# Altium PCB Mounting_PCB_B.PcbDoc
Units mm, origin at the board's own origin, x right, y up, seen from the top; angles counter-clockwise.
Board outline 41.5 x 73 mm, 2 copper layers (Top Layer, Bottom Layer), stack 0.325 mm thick; 24 components, 38 nets, 162 pads, 1 vias.
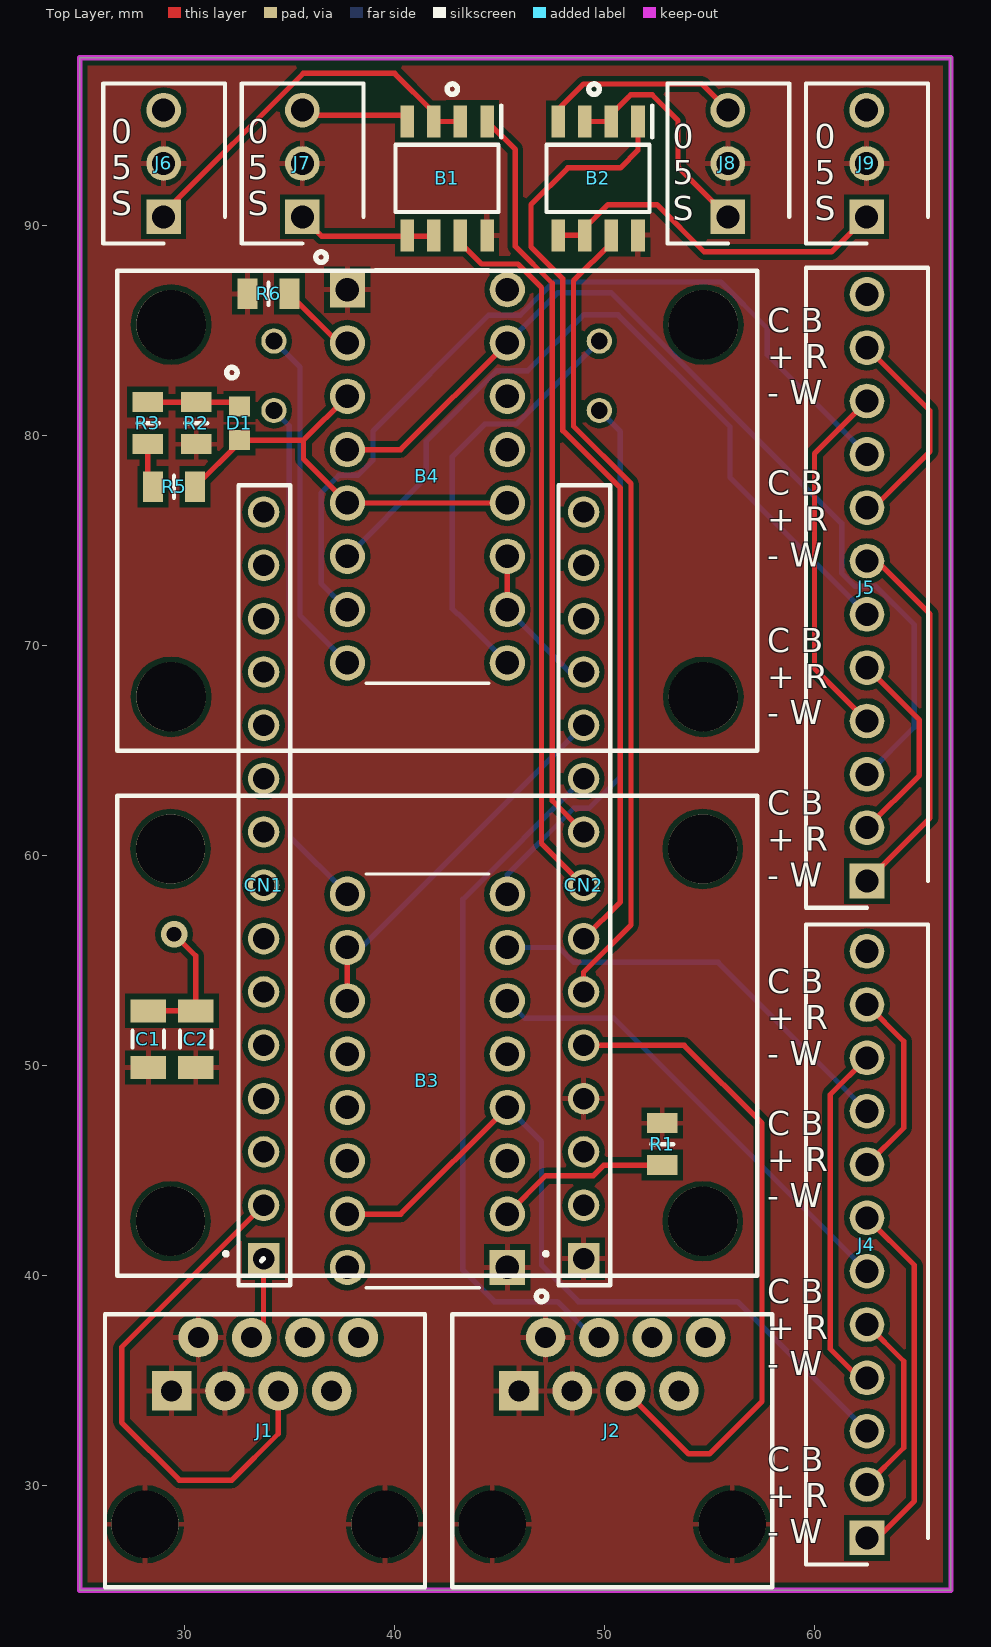
[diagram p0: Top Layer view]
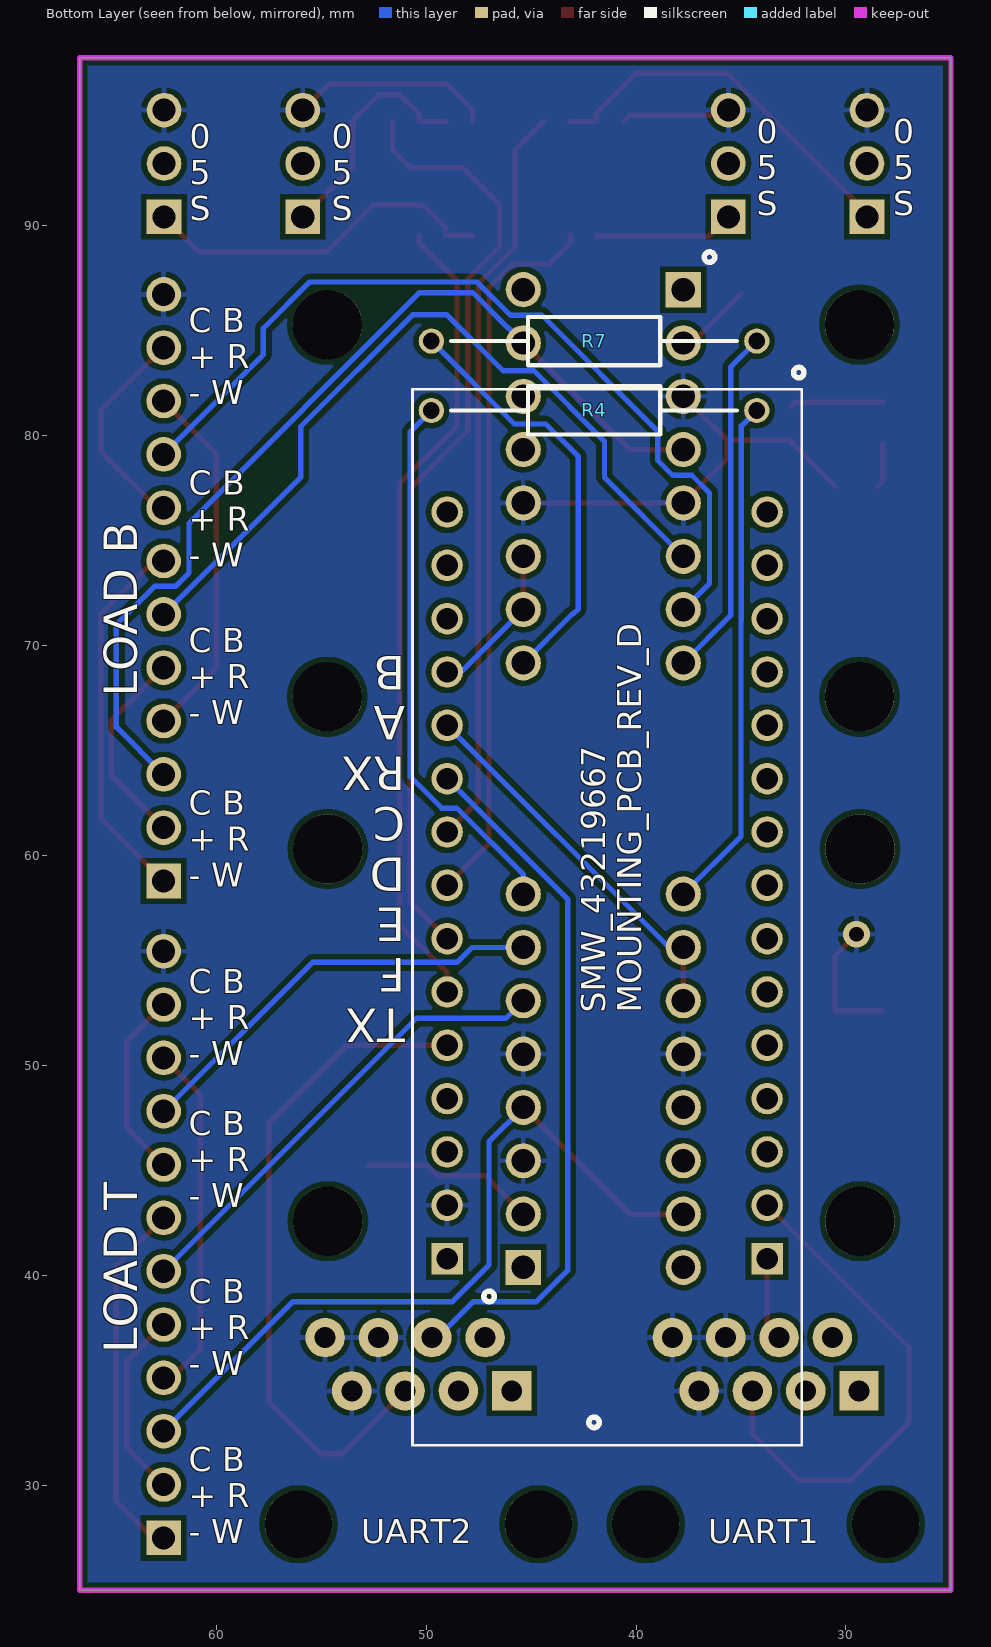
[diagram p1: Bottom Layer view, seen from below]

## Layer stack, top to bottom
Top Solder: solder mask 0.0102, Solder Resist, Dk 3.5
Top Layer: signal copper 0.0356
Dielectric 1: core 0.254, FR-4, Dk 4.2
Bottom Layer: signal copper 0.0356
Solder Side: solder mask 0.0102, Solder Resist, Dk 3.5

## Board outline
25,25 25,98 66.5,98 66.5,25

## Design rules (kind name [scope] priority, off if disabled: settings)
Clearance [All] p1: gap=0.254
PolygonConnect [All] p1: connectstyle=Relief reliefconductorwidth=0.254 reliefentries=4 polygonreliefangle="90 Angle" airgapwidth=0.254
RoomDefinition Mounting_PCB_B [InComponentClass('Mounting_PCB_B')] p1: confinementstyle=ConfineIn formatcopy=TRUE lockcomponents=FALSE outline 25,17 66.5,17 66.5,98 25,98
RoutingVias [All] p1: holewidth=0.711 width=1.27 viastyle="Through Hole" minholewidth=0.711 minwidth=1.27 maxholewidth=0.711 maxwidth=1.27
SolderMaskExpansion [All] p1: expansion=0.102
Width [All] p1: maxlimit=0.254 minlimit=0.254 preferedwidth=0.254
30 further rules are at their usual default settings.

## Components (designator, comment, footprint, x,y, rotation, side; value= is the part's Value field where it differs from the comment)
B1 "LM358AD" SOIC127P600X175-8N 42.5,92.25 r270 top
B2 "LM358AD" SOIC127P600X175-8N 49.692,92.25 r270 top
B3 "INA125PA" DIP254P762X508-16 37.75,58.16 r180 top
B4 "INA125PA" DIP254P762X508-16 45.37,69.17 r0 top
C1 "Cap 1206" C1206 28.272,51.249 r270 top
C2 "Cap 1206" C1206 30.527,51.249 r270 top
CN1 "Header 15X1_male" HDR_1x15_2R54_V_F 33.76,40.8 r90 top
CN2 "Header 15X1_male" HDR_1x15_2R54_V_F 49,40.8 r90 top
D1 "LED1" L0603 32.609,80.582 r270 top
J1 "RJ45-8" RJ45-8 33.825,28.15 r0 top
J2 "RJ45-8" RJ45-8 50.365,28.15 r0 top
J4 "22-27-2121" HDRV12W64P0X254_1X12_3048X580X1170P 62.5,27.5 r270 top
J5 "22-27-2121" HDRV12W64P0X254_1X12_3048X580X1170P 62.5,58.784 r270 top
J6 "22-27-2031" SHDR3W64P0X254_1X3_762X580X1170P 29,90.42 r90 top
J7 "22-27-2031" SHDR3W64P0X254_1X3_762X580X1170P 35.604,90.42 r90 top
J8 "22-27-2031" SHDR3W64P0X254_1X3_762X580X1170P 55.876,90.42 r90 top
J9 "22-27-2031" SHDR3W64P0X254_1X3_762X580X1170P 62.48,90.42 r90 top
R1 "CRCW080510K0FKEA" RESC2012X50N 52.75,46.25 r270 top
R2 "CRCW080510K0FKEA" RESC2012X50N 30.554,80.591 r90 top
R3 "CRCW080510K0FKEA" RESC2012X50N 28.25,80.591 r90 top
R4 "7077666" RESAD1550W58L630D230 49.75,81.196 r180 bottom
R5 "CRCW080510K0FKEA" RESC2012X50N 29.5,77.561 r180 top
R6 "CRCW080510K0FKEA" RESC2012X50N 34,86.75 r0 top
R7 "7077666" RESAD1550W58L630D230 34.25,84.5 r0 bottom

## Footprints (in the part's own frame and the unit in brackets; to place one, negate y for a bottom-side part, rotate by r counter-clockwise, add the part's x,y. Pads: shape width x height; smd on the part's side, far side on the other; paste and mask are expansions set on the pad)
C1206 [mm] "Chip Capacitor, Body 3.2x1.6mm, IPC High Density"
  rect 1.1x1.7 smd: 1(-1.35,0) 2(1.35,0)
  silkscreen extent -0.4,-0.75 0.4,0.75, body extent -1.7,-0.9 1.7,0.9, height 1.3
DIP254P762X508-16 [mil]
  rect 66x66 / inner round 66 / far side rect 66x66 hole 44: 1(-300,700)
  round 66 hole 44: 2(-300,600) 3(-300,500) 4(-300,400) 5(-300,300) 6(-300,200) 7(-300,100) 8(-300,0) 9(0,0) 10(0,100) 11(0,200) 12(0,300) 13(0,400) 14(0,500) 15(0,600) 16(0,700)
  silkscreen extent -265,-38 -35,738
HDR_1x15_2R54_V_F [mm] "Male Header, Pitch 2.54mm, 15x1 Position, Mated Height 6mm, Tail Length 3mm"
  rect 1.5x1.5 hole 1.02: 1(0,0)
  round 1.5 hole 1.02: 2(2.54,0) 3(5.08,0) 4(7.62,0) 5(10.16,0) 6(12.7,0) 7(15.24,0) 8(17.78,0) 9(20.32,0) 10(22.86,0) 11(25.4,0) 12(27.94,0) 13(30.48,0) 14(33.02,0) 15(35.56,0)
  silkscreen extent -1.27,-1.27 36.83,1.85, body extent -1.27,-1.27 36.83,1.27, height 12.7
HDRV12W64P0X254_1X12_3048X580X1170P [mm]
  rect 1.65x1.65 / inner round 1.65 / far side rect 1.65x1.65 hole 1.1: 1(0,0)
  round 1.65 hole 1.1: 2(-2.54,0) 3(-5.08,0) 4(-7.62,0) 5(-10.16,0) 6(-12.7,0) 7(-15.24,0) 8(-17.78,0) 9(-20.32,0) 10(-22.86,0) 11(-25.4,0) 12(-27.94,0)
  silkscreen extent -29.21,-2.9 1.27,2.9
L0603 [mm]
  rect 0.95x1 smd: 1(-0.8,0) 2(0.8,0)
RESAD1550W58L630D230 [mm]
  round 1.2 hole 0.8: 1(0,0) 2(15.5,0)
  silkscreen extent 0.95,-1.15 14.55,1.15
RESC2012X50N [mm]
  rect 0.95x1.45 smd: 1(-1,0) 2(1,0)
  silkscreen extent 0,-0.53 0,0.53
RJ45-8 [mil]
  round 125.98 hole 125.98: 1(-225,0) 1(225,0)
  rect 74x74 hole 39.37: 1(-175,250)
  round 74 hole 39.37: 2(-125,350) 3(-75,250) 4(-25,350) 5(25,250) 6(75,350) 7(125,250) 8(175,350)
  silkscreen extent -300,-118 300,394
SHDR3W64P0X254_1X3_762X580X1170P [mm]
  rect 1.65x1.65 / inner round 1.65 / far side rect 1.65x1.65 hole 1.1: 1(0,0)
  round 1.65 hole 1.1: 2(2.54,0) 3(5.08,0)
  silkscreen extent -1.27,-2.92 6.35,2.88
SOIC127P600X175-8N [mm]
  rect 1.525x0.65 smd: 1(-2.712,1.905) 2(-2.712,0.635) 3(-2.712,-0.635) 4(-2.712,-1.905) 5(2.712,-1.905) 6(2.712,-0.635) 7(2.712,0.635) 8(2.712,1.905)
  silkscreen extent -3.47,-2.45 1.6,2.58

## Part data
B1 B2: "LM358AD, Dual Operational Amplifier 1.1MHz 5 to 28V, 8-Pin SO"
B3 B4: "Instrumentation Amplifier with Precision Voltage Reference"
C1 C2: library part "Cap Semi", "Capacitor (Semiconductor SIM Model)"
CN1 CN2: library part "Header 15X1_Female_1", "Header, 10-Pin, Single row,female"
D1: "Typical RED GaAs LED"
J4 J5: "12way straightPCB header w/friction lock Molex KK Series, Series Number 6410, 2.54mm Pitch 12 Way 1 Row Straight PCB Header, Solder Termination, 4A"
J6 J7 J8 J9: "3way straight PCB header w/friction lock Molex KK Series, Series Number 6410, 2.54mm Pitch 3 Way 1 Row Straight PCB Header, Solder Termination, 4A"
R1 R2 R3 R5 R6: "CRCW0805 Resistor T/R 0.125W,1%,10K Vishay CRCW Series Thick Film Surface Mount Resistor 0805 Case 10k 1% 0.125W 100ppm/C"
R4 R7: "RS Pro RS Series Axial Carbon Resistor 1k 5% 0.25W -500  +350ppm/C"

## Free pads (board coordinates)
  round 3.302 hole 3.302: 2(29.33,42.581) 2(29.33,60.31) 2(29.355,67.555) 2(29.355,85.285) 2(54.679,42.581) 2(54.679,60.31) 2(54.705,67.555) 2(54.705,85.285)

## Via types
v1: diameter 1.27, hole 0.711, Top Layer to Bottom Layer, 1 vias

## Nets (pads, with @x,y where several pads share a name; then routed paths per layer and width w, separated by ;. In a path a pad name is that pad's centre, name@x,y a point inside that pad or via, vN(x,y) a via of type N, cw(c..) or ccw(c..) an arc to the next point about the centre after c; other vN are vias at no path point)
+5V: B1.8 B2.8 B3.1 B4.1 C1.2 C2.2 CN2.1 CN2.4 J1.1 J1.2 J1.3 J2.1 J2.2 J2.3 J6.2 J7.2 J8.2 J9.2 R1.1 R2.1 R6.1
A+_B: B4.6 J5.6 | length 37.8
  Bottom Layer w0.254: B4.6 41.5,78 41.5,79.724 44.865,83.089 46.339,83.089 49,85.75 50.647,85.75 55.975,80.422 55.975,78.009 J5.6
A+_T: B3.6 J4.6 | length 22.5
  Bottom Layer w0.254: B3.6 46.2,52.25 50.45,52.25 J4.6
A-_B: B4.7 J5.9 | length 41.2
  Bottom Layer w0.254: B4.7 36.5,72.96 36.5,77.264 37.347,78.111 38.255,78.111 38.969,78.825 38.969,80.219 44.481,85.731 45.981,85.731 47.567,87.317 55.546,87.317 57.75,85.113 57.75,83.854 J5.9
A-_T: B3.7 J4.9 | length 20.4
  Bottom Layer w0.254: B3.7 47.821,55.62 48.532,54.909 55.411,54.909 J4.9
ADC_A: B3.10 B3.11 CN2.11 | length 18.2
  Top Layer w0.254: B3.11 B3.10
  Bottom Layer w0.254: B3.10 38.42,55.62 CN2.11
ADC_B: B4.10 B4.11 CN2.12 | length 7.4
  Top Layer w0.254: B4.10 B4.11
  Bottom Layer w0.254: B4.10 48.34,68.74 CN2.12
ADC_C: B1.1 CN2.9 | length 35.7
  Top Layer w0.254: B1.1 45.75,93.617 45.75,89.013 47.508,87.255 47.508,62.612 CN2.9
ADC_D: B1.7 CN2.8 | length 34.4
  Top Layer w0.254: B1.7 43.135,89.182 44.147,88.169 45.875,88.169 47,87.044 47,60.58 CN2.8
ADC_E: B2.1 CN2.7 | length 45
  Top Layer w0.254: CN2.7 50.75,57.79 50.75,77.5 48.016,80.234 48.016,87.465 46.5,88.981 46.5,91 48.25,92.75 50.75,92.75 51.597,93.597 B2.1
ADC_F: B2.7 CN2.6 | length 38.9
  Top Layer w0.254: CN2.6 49,54.441 51.258,56.699 51.258,77.71 48.524,80.444 48.524,87.379 50.327,89.182 B2.7
E+_B: B4.4 B4.15 J5.3 | length 46.1
  Top Layer w0.254: B4.4 40.29,79.33 B4.15
  Bottom Layer w0.254: B4.15 46.081,85.121 46.09,85.121 47.777,86.809 50.307,86.809 61.294,75.822 61.294,73.456 61.932,72.818 62.932,72.818 64.75,71 64.75,66.114 J5.3
E+_T: B3.4 B3.15 J4.3 | length 36.7
  Top Layer w0.254: B3.15 40.29,42.92 B3.4
  Bottom Layer w0.254: B3.4 47,46.37 47,40.5 48.75,38.75 56.33,38.75 J4.3
GND: B1.4 B2.4 B3.3 B3.5 B3.12 B4.3 B4.5 B4.12 C1.1 C2.1 CN2.2 D1.2 J1.6 J1.7 J1.8 J2.6 J2.7 J2.8 J4.12 J5.12 J6.3 J7.3 J8.3 J9.3 R5.1 | length 41.8
  Top Layer w0.254: C1.1 C2.1 30.527,55.223 v1(29.5,56.25) ; R5.1 32.609,79.67 D1.2 35.662,79.782 ; J7.3 35.854,95.25 40.307,95.25 B1.4 ; B4.3 35.662,79.782 ; B4.12 B4.5 35.662,78.878 35.662,79.782 ; B2.4 47.787,95.529 49,96.742 54.634,96.742 J8.3
IN_C: B1.2 B1.3 J6.1 | length 18.3
  Top Layer w0.254: J6.1 29,90.601 35.649,97.25 40,97.25 41.865,95.385 B1.3 B1.2
IN_D: B1.5 B1.6 J7.1 | length 6.7
  Top Layer w0.254: J7.1 36.524,89.5 41.827,89.5 B1.6
IN_E: B2.2 B2.3 J8.1 | length 11.3
  Top Layer w0.254: B2.3 B2.2 50.327,95.318 51.114,96.106 51.122,96.106 51.25,96.234 52.266,96.234 53.5,95 53.5,92.796 J8.1
IN_F: B2.5 B2.6 J9.1 | length 17.5
  Top Layer w0.254: B2.5 B2.6 49.057,89.894 50.162,91 52.5,91 54.75,88.75 60.81,88.75 J9.1 J9.1@62.48,90.77
N1_B: J5.1 J5.7 | length 18
  Top Layer w0.254: J5.1 65.5,61.784 65.5,71.5 62.976,74.024 J5.7
N1_T: J4.1 J4.7 | length 17.4
  Top Layer w0.254: J4.1 63,27.5 64.758,29.258 64.758,40.482 J4.7
N2_B: J5.4 J5.10 | length 17.3
  Top Layer w0.254: J5.4 60,68.904 60,79.144 J5.10
N2_T: J4.4 J4.10 | length 16.9
  Top Layer w0.254: J4.4 62.13,35.12 60.75,36.5 60.75,48.61 J4.10
N3_B: J5.2 J5.5 | length 9.7
  Top Layer w0.254: J5.2 64.992,63.816 64.992,66.452 J5.5
N3_T: J4.2 J4.5 | length 9.1
  Top Layer w0.254: J4.2 64.25,31.79 64.25,35.91 J4.5
N4_B: J5.8 J5.11 | length 10.3
  Top Layer w0.254: J5.8 62.814,76.564 65.5,79.25 65.5,81.184 J5.11
N4_T: J4.8 J4.11 | length 9.1
  Top Layer w0.254: J4.8 64.25,47.03 64.25,51.15 J4.11
NetB3_2: B3.2 R1.2 | length 8.3
  Top Layer w0.254: B3.2 47.199,44.749 49.468,44.749 49.969,45.25 R1.2
NetB3_8: B3.8 R4.1 | length 26.1
  Bottom Layer w0.254: B3.8 45.37,59.089 48.532,62.251 49.25,62.251 50.75,63.751 50.75,80.196 R4.1
NetB3_9: B3.9 R4.2 | length 24.5
  Bottom Layer w0.254: R4.2 34.984,80.462 34.984,71.218 35,71.202 35,60.91 B3.9
NetB4_2: B4.2 R6.2 | length 3.7
  Top Layer w0.254: R6.2 37.34,84.41 B4.2
NetB4_8: B4.8 R7.1 | length 16.8
  Bottom Layer w0.254: R7.1 35.492,83.258 35.492,71.428 B4.8
NetB4_9: B4.9 R7.2 | length 20.2
  Bottom Layer w0.254: B4.9 43.04,71.5 43,71.5 42.75,71.75 42.75,79 44.299,80.549 45.799,80.549 R7.2
NetD1_1: D1.1 R2.2 R3.2 | length 4.4
  Top Layer w0.254: R3.2 R2.2 32.4,81.591 D1.1
NetR3_1: R3.1 R5.2 | length 2.1
  Top Layer w0.254: R3.1 28.25,77.812 R5.2
UART1_RX: CN1.2 J1.5 | length 24.7
  Top Layer w0.254: CN1.2 27,36.58 27,33 29.75,30.25 32.25,30.25 34.46,32.46 J1.5
UART1_TX: CN1.1 J1.4 | length 4
  Top Layer w0.254: J1.4 33.76,37.61 CN1.1
UART2_RX: CN2.10 J2.4 | length 33.6
  Bottom Layer w0.254: CN2.10 43.25,57.91 43.25,40.25 44.75,38.75 47.75,38.75 49.46,37.04 J2.4
UART2_TX: CN2.5 J2.5 | length 32.1
  Top Layer w0.254: CN2.5 53.79,50.96 57.5,47.25 57.5,34 55,31.5 54,31.5 J2.5
pads on no net: B3.13 B3.14 B3.16 B4.13 B4.14 B4.16 CN1.3 CN1.4 CN1.5 CN1.6 CN1.7 CN1.8 CN1.9 CN1.10 CN1.11 CN1.12 CN1.13 CN1.14 CN1.15 CN2.3 CN2.13 CN2.14 CN2.15

## Polygon pours and split planes (outlines as drawn)
+5V on Top Layer "+5V_L01_P007" (solid, remove dead copper, pour order 7): 25,25 25,98 66.5,98 66.5,25
GND on Bottom Layer "GND_L02_P008" (solid, remove dead copper, pour order 8): 25,25 25,98 66.5,98 66.5,25

## Keep-outs
Keep-Out Layer:
  the board outline again, w0.254

## Silkscreen, mask and mechanical layers (free items; w line width, h text height)
Top Overlay:
  circle w0.254: c47,39 r0.25
  circle w0.254: c36.5,88.5 r0.25
  circle w0.254: c42.75,96.5 r0.25
  circle w0.254: c49.5,96.5 r0.25
  circle w0.254: c32.25,83 r0.25
  circle w0.254: c32.25,83 r0.25
  lines w0.203: 26.79,39.99 57.27,39.99 57.27,62.85 26.79,62.85 26.79,39.99 ; 26.79,64.99 26.79,87.85 57.27,87.85 57.27,64.99 26.79,64.99
  lines w0.254: 33.658,40.698 33.76,40.8
  text "0 / 5 / S" at 26.5,90.5 h1.14
  text "0 / 5 / S" at 33,90.5 h1.14
  text "0 / 5 / S" at 53.25,90.25 h1.14
  text "0 / 5 / S" at 60,90.25 h1.14
  text "C B / + R / - W" at 57.75,81.5 h1.14
  text "C B / + R / - W" at 57.75,73.75 h1.14
  text "C B / + R / - W" at 57.75,66.25 h1.14
  text "C B / + R / - W" at 57.75,58.5 h1.14
  text "C B / + R / - W" at 57.75,50 h1.14
  text "C B / + R / - W" at 57.75,43.25 h1.14
  text "C B / + R / - W" at 57.75,35.25 h1.14
  text "C B / + R / - W" at 57.75,27.25 h1.14
Bottom Overlay:
  circle w0.254: c42,33 r0.25
  circle w0.254: c36.5,88.5 r0.25
  circle w0.254: c47,39 r0.25
  circle w0.254: c32.25,83 r0.25
  lines w0.127: 32.109,31.91 32.109,82.202 50.651,82.202 50.651,31.91 32.109,31.91
  text "0 / 5 / S" at 27.75,90.5 h1.14
  text "0 / 5 / S" at 34.25,90.5 h1.14
  text "0 / 5 / S" at 54.5,90.25 h1.14
  text "0 / 5 / S" at 61.25,90.25 h1.14
  text "C B / + R / - W" at 61.305,81.5 h1.14
  text "C B / + R / - W" at 61.305,73.75 h1.14
  text "TX / F / E / D / C / RX / A / B" at 51,69.5 h1.6 r180
  text "LOAD B" at 63.75,67.568 h1.6 r270
  text "C B / + R / - W" at 61.305,66.25 h1.14
  text "C B / + R / - W" at 61.305,58.5 h1.14
  text "SMW_43219667 / MOUNTING_PCB_REV_D" at 39.75,52.5 h1.14 r270
  text "C B / + R / - W" at 61.305,50 h1.14
  text "C B / + R / - W" at 61.305,43.25 h1.14
  text "LOAD T" at 63.75,36.284 h1.6 r270
  text "C B / + R / - W" at 61.305,35.25 h1.14
  text "UART1" at 36.555,27.25 h1.14
  text "UART2" at 53.095,27.25 h1.14
  text "C B / + R / - W" at 61.305,27.25 h1.14